# EAGLE board TEST_BATT_BOT (EAGLE 9.6.2)
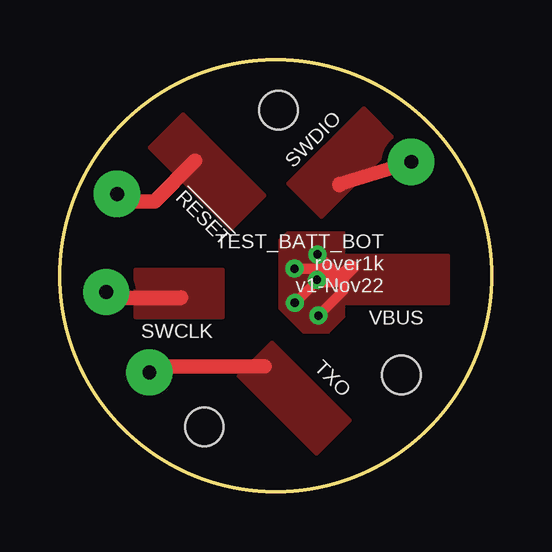
[diagram p0: board, top side]
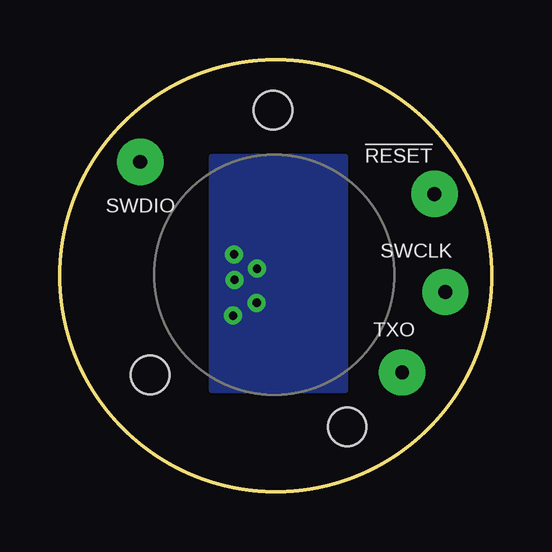
[diagram p1: board, bottom side, seen from below]

Size 18 x 18 mm. Coordinates in mm from the lower left corner, seen from the top.
Outline: circle at 9,9 radius 9
Copper layers (1*16): Top 0.035mm / dielectric 1.5mm / Bottom 0.035mm
Design rules "default *": minimum track width 0.00038125mm, minimum drill 0.35mm, track to track 8mil, track to pad 8mil, pad to pad 8mil, via to via 8mil, smd to smd 5mil, copper to edge 8mil, drill to drill 8mil, minimum pad ring 10mil, minimum via ring 8mil, stop-mask expansion 2mil, vias tented up to drill 50mil, thermal gap 10mil
Holes 1.6 mm at 14.24,4.87 6.02,2.7 9.11,15.91

## Footprints (pad centres in the part's own frame; a part is rotated, then mirrored left to right if it is on the bottom)
1X01_POGOPIN_HOLE_0.061_DIA = drill 0.58 pad 1.93: 2 0,0

## Placement (x,y rotation side)
!RESET  [1X01_POGOPIN_HOLE_0.061_DIA]  2.38,12.41 0 top
SWCLK  [1X01_POGOPIN_HOLE_0.061_DIA]  1.93,8.32 0 top
SWDIO  [1X01_POGOPIN_HOLE_0.061_DIA]  14.65,13.75 0 top
TXO  [1X01_POGOPIN_HOLE_0.061_DIA]  3.73,4.97 0 top

## Library data of the parts
!RESET SWCLK SWDIO TXO = SparkFun-Connectors

## Nets
!RESET: !RESET.2
SWCLK: SWCLK.2
SWDIO: SWDIO.2
TXO: TXO.2

## Tracks (layer width: path | path; a pad name or v marks a point on that pad's centre or on a via)
!RESET
  Top 0.61: !RESET.2 2.69,12.1 3.94,12.1 5.64,13.8
  pour Top: 7.13,10.92 8.54,12.34 5.13,15.75 3.71,14.34
SWCLK
  Top 0.61: SWCLK.2 2.18,8.07 5.03,8.07 5.05,8.09
  pour Top: 3.14,9.25 3.14,7.25 6.81,7.25 6.81,9.25
SWDIO
  Top 0.61: SWDIO.2 11.65,12.82 11.65,12.78
  pour Top: 9.49,12.84 10.91,11.43 14.08,14.6 12.67,16.02
TXO
  Top 0.61: TXO.2 3.97,5.21 8.53,5.21
  pour Top: 10.69,1.55 12.11,2.97 8.83,6.24 7.42,4.82
VBUS  (via drill 0.35)
  Top 0.406: v10.74,9.89 11.63,9 11.63,8.83 | v9.8,7.87 10.76,8.83 11.63,8.83 | v10.78,7.34 11.84,8.4 11.84,9.04 | v9.78,9.3 11.16,9.3 11.63,8.83
  Top 0.61: v10.72,8.83 11.63,8.83 11.84,9.04 12.15,9.35
  pour Bottom: 6.13,13.93 11.63,13.93 11.63,4.27 6.13,4.27
  pour Top: 11.32,9.85 11.32,7.85 16.2,7.85 16.2,9.85
  pour Top (isolate 0.254): 9.14,10.47 9.14,7.64 10.14,6.64 11.22,6.64 11.85,7.27 11.86,7.28 11.86,10.32 11.86,10.5 11.86,10.8 11.87,10.81 9.47,10.81 9.14,10.48

## Text on the board
tNames: SWDIO | !RESET | TEST_BATT_BOT / rover1k / v1-Nov22 | VBUS | SWCLK | TXO